# EAGLE board Adafruit TSL2591 Original (EAGLE 6.4)
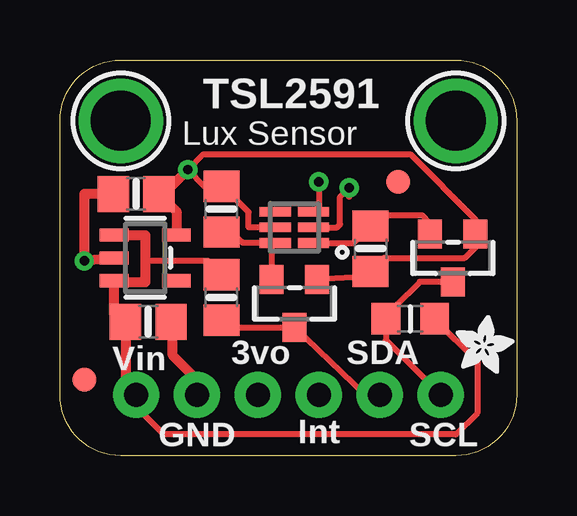
[diagram p0: board, top side]
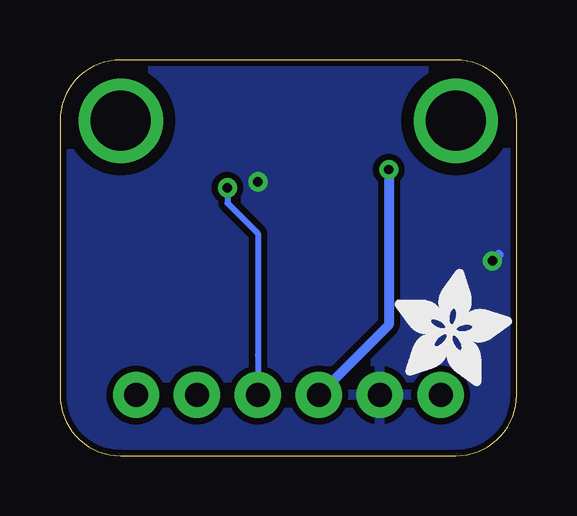
[diagram p1: board, bottom side, seen from below]

Size 19.05 x 16.51 mm. Coordinates in mm from the lower left corner, seen from the top.
Outline: 16.51,0 2.54,0 arc-90 0,2.54 0,13.97 arc-90 2.54,16.51 16.51,16.51 arc-90 19.05,13.97 19.05,2.54 arc-90 16.51,0
Copper layers (1*16): Top 0.035mm / dielectric 1.5mm / Bottom 0.035mm
Design rules "adafruit": minimum track width 8mil, minimum drill 15.5mil, track to track 8mil, track to pad 8mil, pad to pad 8mil, via to via 8mil, smd to smd 8mil, copper to edge 10mil, drill to drill 8mil, minimum pad ring 10mil, minimum via ring 8mil, stop-mask expansion 2mil, vias tented up to drill 20mil, thermal gap 10mil

## Footprints (pad centres in the part's own frame; a part is rotated, then mirrored left to right if it is on the bottom)
0805-NO = smd 1.3 x 1.5: 1 -0.95,0; 2 0.95,0
FIDUCIAL_1MM = smd 1 x 1: 1 0,0
1X06_ROUND_FULL_76 = drill 1 pad 1.93: 1 -6.35,0; 2 -3.81,0; 3 -1.27,0; 4 1.27,0; 5 3.81,0; 6 6.35,0
SOT23-WIDE = smd 1 x 1.2: 1 -0.95,-1; 2 0.95,-1; 3 0,1
_0805MP = smd 1.2 x 1.3: 1 -1.016,0; 2 1.016,0
DFN6_TAOS = smd 1.3 x 0.4: 1 -0.8,0.65; 2 -0.8,0; 3 -0.8,-0.65; 4 0.8,-0.65; 5 0.8,0; 6 0.8,0.65
SOT23-5 = smd 0.55 x 1.2: 1 -0.95,-1.3; 2 0,-1.3; 3 0.95,-1.3; 4 0.95,1.3; 5 -0.95,1.3
MOUNTINGHOLE_2.5_PLATED = drill 2.5 pad 3.2: P$1 0,0

## Placement (x,y rotation side)
C2  10uF  [0805-NO]  3.68,5.59 0 top
C3  10uF  [0805-NO]  3.17,10.92 180 top
FID1  FIDUCIAL""  [FIDUCIAL_1MM]  14.1,11.43 0 top
FID2  FIDUCIAL""  [FIDUCIAL_1MM]  1.02,3.17 0 top
JP1  [1X06_ROUND_FULL_76]  9.53,2.54 0 top
Q1  BSS138  [SOT23-WIDE]  9.78,6.35 180 top
Q2  BSS138  [SOT23-WIDE]  16.38,8.26 180 top
R2  10K  [0805-NO]  6.73,10.29 90 top
R3  10K  [0805-NO]  12.95,8.64 270 top
R4  10K  [0805-NO]  6.73,6.6 90 top
R5  10K  [_0805MP]  14.61,5.71 0 top
U1  TSL2591  [DFN6_TAOS]  9.78,9.53 180 top
U2  MIC5225-3.3  [SOT23-5]  3.56,8.26 270 top
U$15  [ADAFRUIT_2.5MM]  16.51,3.43 0 top
U$18  MOUNTINGHOLE2.5  [MOUNTINGHOLE_2.5_PLATED]  2.54,13.97 0 top
U$19  MOUNTINGHOLE2.5  [MOUNTINGHOLE_2.5_PLATED]  16.51,13.97 0 top
U$20  [ADAFRUIT_5MM]  5.08,2.92 0 bottom

## Library data of the parts
C2 C3 JP1 Q1 Q2 R2-R5 U1 U2 U$15 U$20 = microbuilder
FID1 FID2 U$18 U$19 = microbuilder; BOM: EXCLUDE

## Nets
3.3V: C3.1 JP1.3 Q1.1 Q2.1 R2.2 R3.2 U1.5 U2.5
GND: C2.2 C3.2 JP1.2 U1.3 U2.2
INT: JP1.4 U1.2
SCL: JP1.6 Q2.3 R5.1
SCL_3V: Q2.2 R3.1 U1.1
SDA: JP1.5 Q1.3 R4.1
SDA_3V: Q1.2 R2.1 U1.6
VIN: C2.1 JP1.1 R4.2 R5.2 U2.1 U2.3

## Tracks (layer width: path | path; a pad name or v marks a point on that pad's centre or on a via)
3.3V  (via drill 0.39)
  Top 0.254: U1.5 7.87,9.53 7.87,10.16 6.8,11.24 R2.2 6.04,11.24 v5.33,11.94 5.97,12.57 14.61,12.57 17.33,9.85 Q2.1 17.33,8.7 16.89,8.26 13.52,8.26 R3.2 13,7.48 Q1.1 10.81,7.55
  Top 0.406: U2.5 4.86,10.19 C3.1 4.32,10.92 v5.33,11.94
  Bottom 0.406: v5.33,11.94 5.33,5.46 JP1.3
GND  (via drill 0.39)
  Top 0.254: v10.79,11.43 10.79,10.39 U1.3
  Top 0.406: U2.2 v1.02,8.13 1.02,10.92 C3.2 | JP1.2 5.71,3.17 4.7,4.19 4.7,5.27 C2.2
  Bottom 0.254: v10.79,11.43 10.67,11.43
  Bottom 0.406: v1.02,8.13 0.76,8.38
  pour Bottom (isolate 0.254): 0,16.51 20.32,16.51 20.32,-0.13 0,-0.13
INT  (via drill 0.39)
  Top 0.254: 12.06,10.79 v12.06,11.18 11.68,10.79 11.68,9.65 11.56,9.53 U1.2
  Bottom 0.254: 10.79,4.19 JP1.4 10.79,9.27 12.06,10.54 v12.06,11.18
SCL
  Top 0.254: Q2.3 15,7.25 13.97,6.22 13.97,6.1 R5.1 13.59,4.83 JP1.6
SCL_3V
  Top 0.254: Q2.2 15.43,9.71 15.11,10.03 13.65,10.03 R3.1 12.24,8.88 U1.1
SDA
  Top 0.254: JP1.5 12.72,2.54 Q1.3 7.04,5.35 R4.1
SDA_3V
  Top 0.254: R2.1 6.9,9.51 7.62,8.89 8.96,8.89 U1.6 8.83,8.77 Q1.2
VIN
  Top 0.254: JP1.1 3.17,2.03 4.32,0.89 16.51,0.89 17.4,1.78 17.4,3.94 R5.2 | R4.2 6.16,8.13 3.56,8.13
  Top 0.406: JP1.1 2.73,2.98 C2.1 2.26,5.94 U2.3 2.26,7.24 3.56,7.24 3.56,8.13 3.56,9.21 U2.1

## Text on the board
tPlace: TSL2591 | Lux Sensor | Vin | 3vo | SDA | GND | Int | SCL